# EAGLE board Task 2 (EAGLE 9.7.0)

Size 184.27 x 63.66 mm. Coordinates in mm from the lower left corner, seen from the top.
Outline: 0,0 184.27,0 184.27,63.66 0,63.66 0,0
Copper layers (1*16): Top 0.035mm / dielectric 1.5mm / Bottom 0.035mm
Design rules "default": minimum track width 6mil, minimum drill 0.35mm, track to track 6mil, track to pad 6mil, pad to pad 6mil, via to via 6mil, smd to smd 6mil, copper to edge 40mil, drill to drill 6mil, minimum pad ring 10mil, minimum via ring 8mil, stop-mask expansion 4mil, vias tented up to drill 0mil, thermal gap 10mil

## Footprints (pad centres in the part's own frame; a part is rotated, then mirrored left to right if it is on the bottom)
BATTERY-GENERIC = drill 1.118 pad 3.15 octagon: + 2.54,0; - -2.54,0
CAP-THRU-2.54MM = drill 1.016 pad 1.88: 1 -1.27,0; 2 1.27,0
LEDRD254W60D565H860B = drill 0.981 pad 1.581: 1 -1.27,0; 2 1.27,0
RESAD1016W63L850D250B = drill 0.83 pad 1.43: 1 -5.08,0; 2 5.08,0
TO220V = drill 1.016 long: 1 -2.54,-2.54; 2 0,-2.54; 3 2.54,-2.54
DIP826W53P254L959H508Q8B = drill 0.786 pad 1.386: 1 -4.13,3.81; 2 -4.13,1.27; 3 -4.13,-1.27; 4 -4.13,-3.81; 5 4.13,-3.81; 6 4.13,-1.27; 7 4.13,1.27; 8 4.13,3.81
DIP762W53P254L1969H508Q14B = drill 0.743 pad 1.343: 1 -3.81,7.62; 2 -3.81,5.08; 3 -3.81,2.54; 4 -3.81,0; 5 -3.81,-2.54; 6 -3.81,-5.08; 7 -3.81,-7.62; 8 3.81,-7.62; 9 3.81,-5.08; 10 3.81,-2.54; 11 3.81,0; 12 3.81,2.54; 13 3.81,5.08; 14 3.81,7.62

## Placement (x,y rotation side)
BAT1  9V  [BATTERY-GENERIC]  8.26,44.03 90 top
C1  50u  [CAP-THRU-2.54MM]  53.48,50.88 270 top
D1  RED  [LEDRD254W60D565H860B]  63.64,20.4 270 top
D2  RED  [LEDRD254W60D565H860B]  161.43,31.83 0 top
D3  RED  [LEDRD254W60D565H860B]  166.51,31.83 0 top
D4  RED  [LEDRD254W60D565H860B]  171.59,31.83 0 top
D5  RED  [LEDRD254W60D565H860B]  176.67,31.83 0 top
R1  1000  [RESAD1016W63L850D250B]  58.56,24.21 180 top
R2  10k  [RESAD1016W63L850D250B]  58.56,47.07 0 top
R3  10k  [RESAD1016W63L850D250B]  68.04,52.15 30 top
R4  1000  [RESAD1016W63L850D250B]  167.78,19.13 90 top
R5  1000  [RESAD1016W63L850D250B]  162.7,19.13 90 top
R6  1000  [RESAD1016W63L850D250B]  172.86,19.13 90 top
R7  1000  [RESAD1016W63L850D250B]  177.94,19.13 90 top
R8  10k  [RESAD1016W63L850D250B]  91.58,16.59 90 top
R9  10k  [RESAD1016W63L850D250B]  99.2,16.59 90 top
R10  10k  [RESAD1016W63L850D250B]  111.9,16.59 90 top
R11  10k  [RESAD1016W63L850D250B]  119.52,16.59 90 top
R12  10k  [RESAD1016W63L850D250B]  89.72,52.15 150 top
R13  10k  [RESAD1016W63L850D250B]  97.34,52.15 330 top
R14  10k  [RESAD1016W63L850D250B]  110.04,52.15 330 top
R15  10k  [RESAD1016W63L850D250B]  117.66,52.15 330 top
R16  10k  [RESAD1016W63L850D250B]  83.28,16.59 30 top
R17  10k  [RESAD1016W63L850D250B]  114.44,8.97 270 top
R18  10k  [RESAD1016W63L850D250B]  116.98,54.69 90 top
R19  10k  [RESAD1016W63L850D250B]  96.66,54.69 90 top
U1  LM7805_TO220V  [TO220V]  28.08,31.83 0 top
U2  LM555_DIP  [DIP826W53P254L959H508Q8B]  52.21,35.64 90 top
U3  74HC74_PDIP  [DIP762W53P254L1969H508Q14B]  99.2,35.64 90 top
U4  74HC74_PDIP  [DIP762W53P254L1969H508Q14B]  119.52,35.64 90 top

## Library data of the parts
BAT1 C1 R1-R19 U1 U3 U4 = Tinkercad
D1-D5 = Tinkercad; CATEGORY: Opto-Electronic; SUB-CATEGORY: LED; VALUE: LED_RED
U2 = Tinkercad; CATEGORY: IC_Clock-Timing; CURRENT-SUPPLY: 10mA; DESCRIPTION: IC OSC SINGLE TIMER 100KHZ 8-DIP; FREQUENCY: 100kHz; MANUFACTURER: Texas Instruments; MPN: LM555CN/NOPB; OPERATING_TEMP: 0°C to 70°C; PART_STATUS: Active; ROHS_COMPLIANT: ROHS3 Compliant; SUB-CATEGORY: Timer

## Nets
BAT1+: BAT1.+ U1.1
BAT1-: BAT1.- C1.1 D1.2 R4.1 R5.1 R6.1 R7.1 R16.1 R17.1 R18.2 R19.2 U1.2 U2.1 U3.7 U4.7
D1_A: D1.1 R1.1
D2_C: D2.2 R5.2
D3_C: D3.2 R4.2
D4_C: D4.2 R6.2
D5_C: D5.2 R7.2
U2_!RST: R3.2 R8.1 R9.1 R10.1 R11.1 R12.2 R13.1 R14.1 R15.1 U1.3 U2.4 U2.8 U3.14 U4.14
U2_DIS: R2.2 R3.1 U2.7
U2_OUT: R1.2 U2.3 U3.3
U2_TR: C1.2 R2.1 U2.2 U2.6
U3_1!Q: D5.1 R16.2 U3.2 U3.6
U3_1Q: U3.5 U4.3
U3_2!Q: D2.1 R19.1 U3.8 U3.12
U3_CLR1: R8.2 U3.1
U3_CLR2: R12.1 U3.13
U3_PRE1: R9.2 U3.4
U3_PRE2: R13.2 U3.10
U4_1!Q: D4.1 R17.2 U4.2 U4.6
U4_2!Q: D3.1 R18.1 U4.8 U4.12
U4_2Q: U3.11 U4.9
U4_CLK2: U4.5 U4.11
U4_CLR1: R10.2 U4.1
U4_CLR2: R14.2 U4.13
U4_PRE1: R11.2 U4.4
U4_PRE2: R15.2 U4.10

## Tracks (layer width: path | path; a pad name or v marks a point on that pad's centre or on a via)
BAT1+  (1 unrouted)
BAT1-  (14 unrouted)
D1_A  (1 unrouted)
D2_C  (1 unrouted)
D3_C  (1 unrouted)
D4_C  (1 unrouted)
D5_C  (1 unrouted)
U2_!RST  (13 unrouted)
U2_DIS  (2 unrouted)
U2_OUT  (2 unrouted)
U2_TR  (3 unrouted)
U3_1!Q  (3 unrouted)
U3_1Q  (1 unrouted)
U3_2!Q  (3 unrouted)
U3_CLR1  (1 unrouted)
U3_CLR2  (1 unrouted)
U3_PRE1  (1 unrouted)
U3_PRE2  (1 unrouted)
U4_1!Q  (3 unrouted)
U4_2!Q  (3 unrouted)
U4_2Q  (1 unrouted)
U4_CLK2  (1 unrouted)
U4_CLR1  (1 unrouted)
U4_CLR2  (1 unrouted)
U4_PRE1  (1 unrouted)
U4_PRE2  (1 unrouted)